# Altium PCB PCB1.PcbDoc (part 2 of 4)
Units mm, origin at the board's own origin, x right, y up, seen from the top; angles counter-clockwise.
Board outline 100 x 100 mm, 4 copper layers (Component Side 1, Ground Plane, Power Plane, Component Side 2), stack 0.844 mm thick; 174 components, 192 nets, 1098 pads, 545 vias.
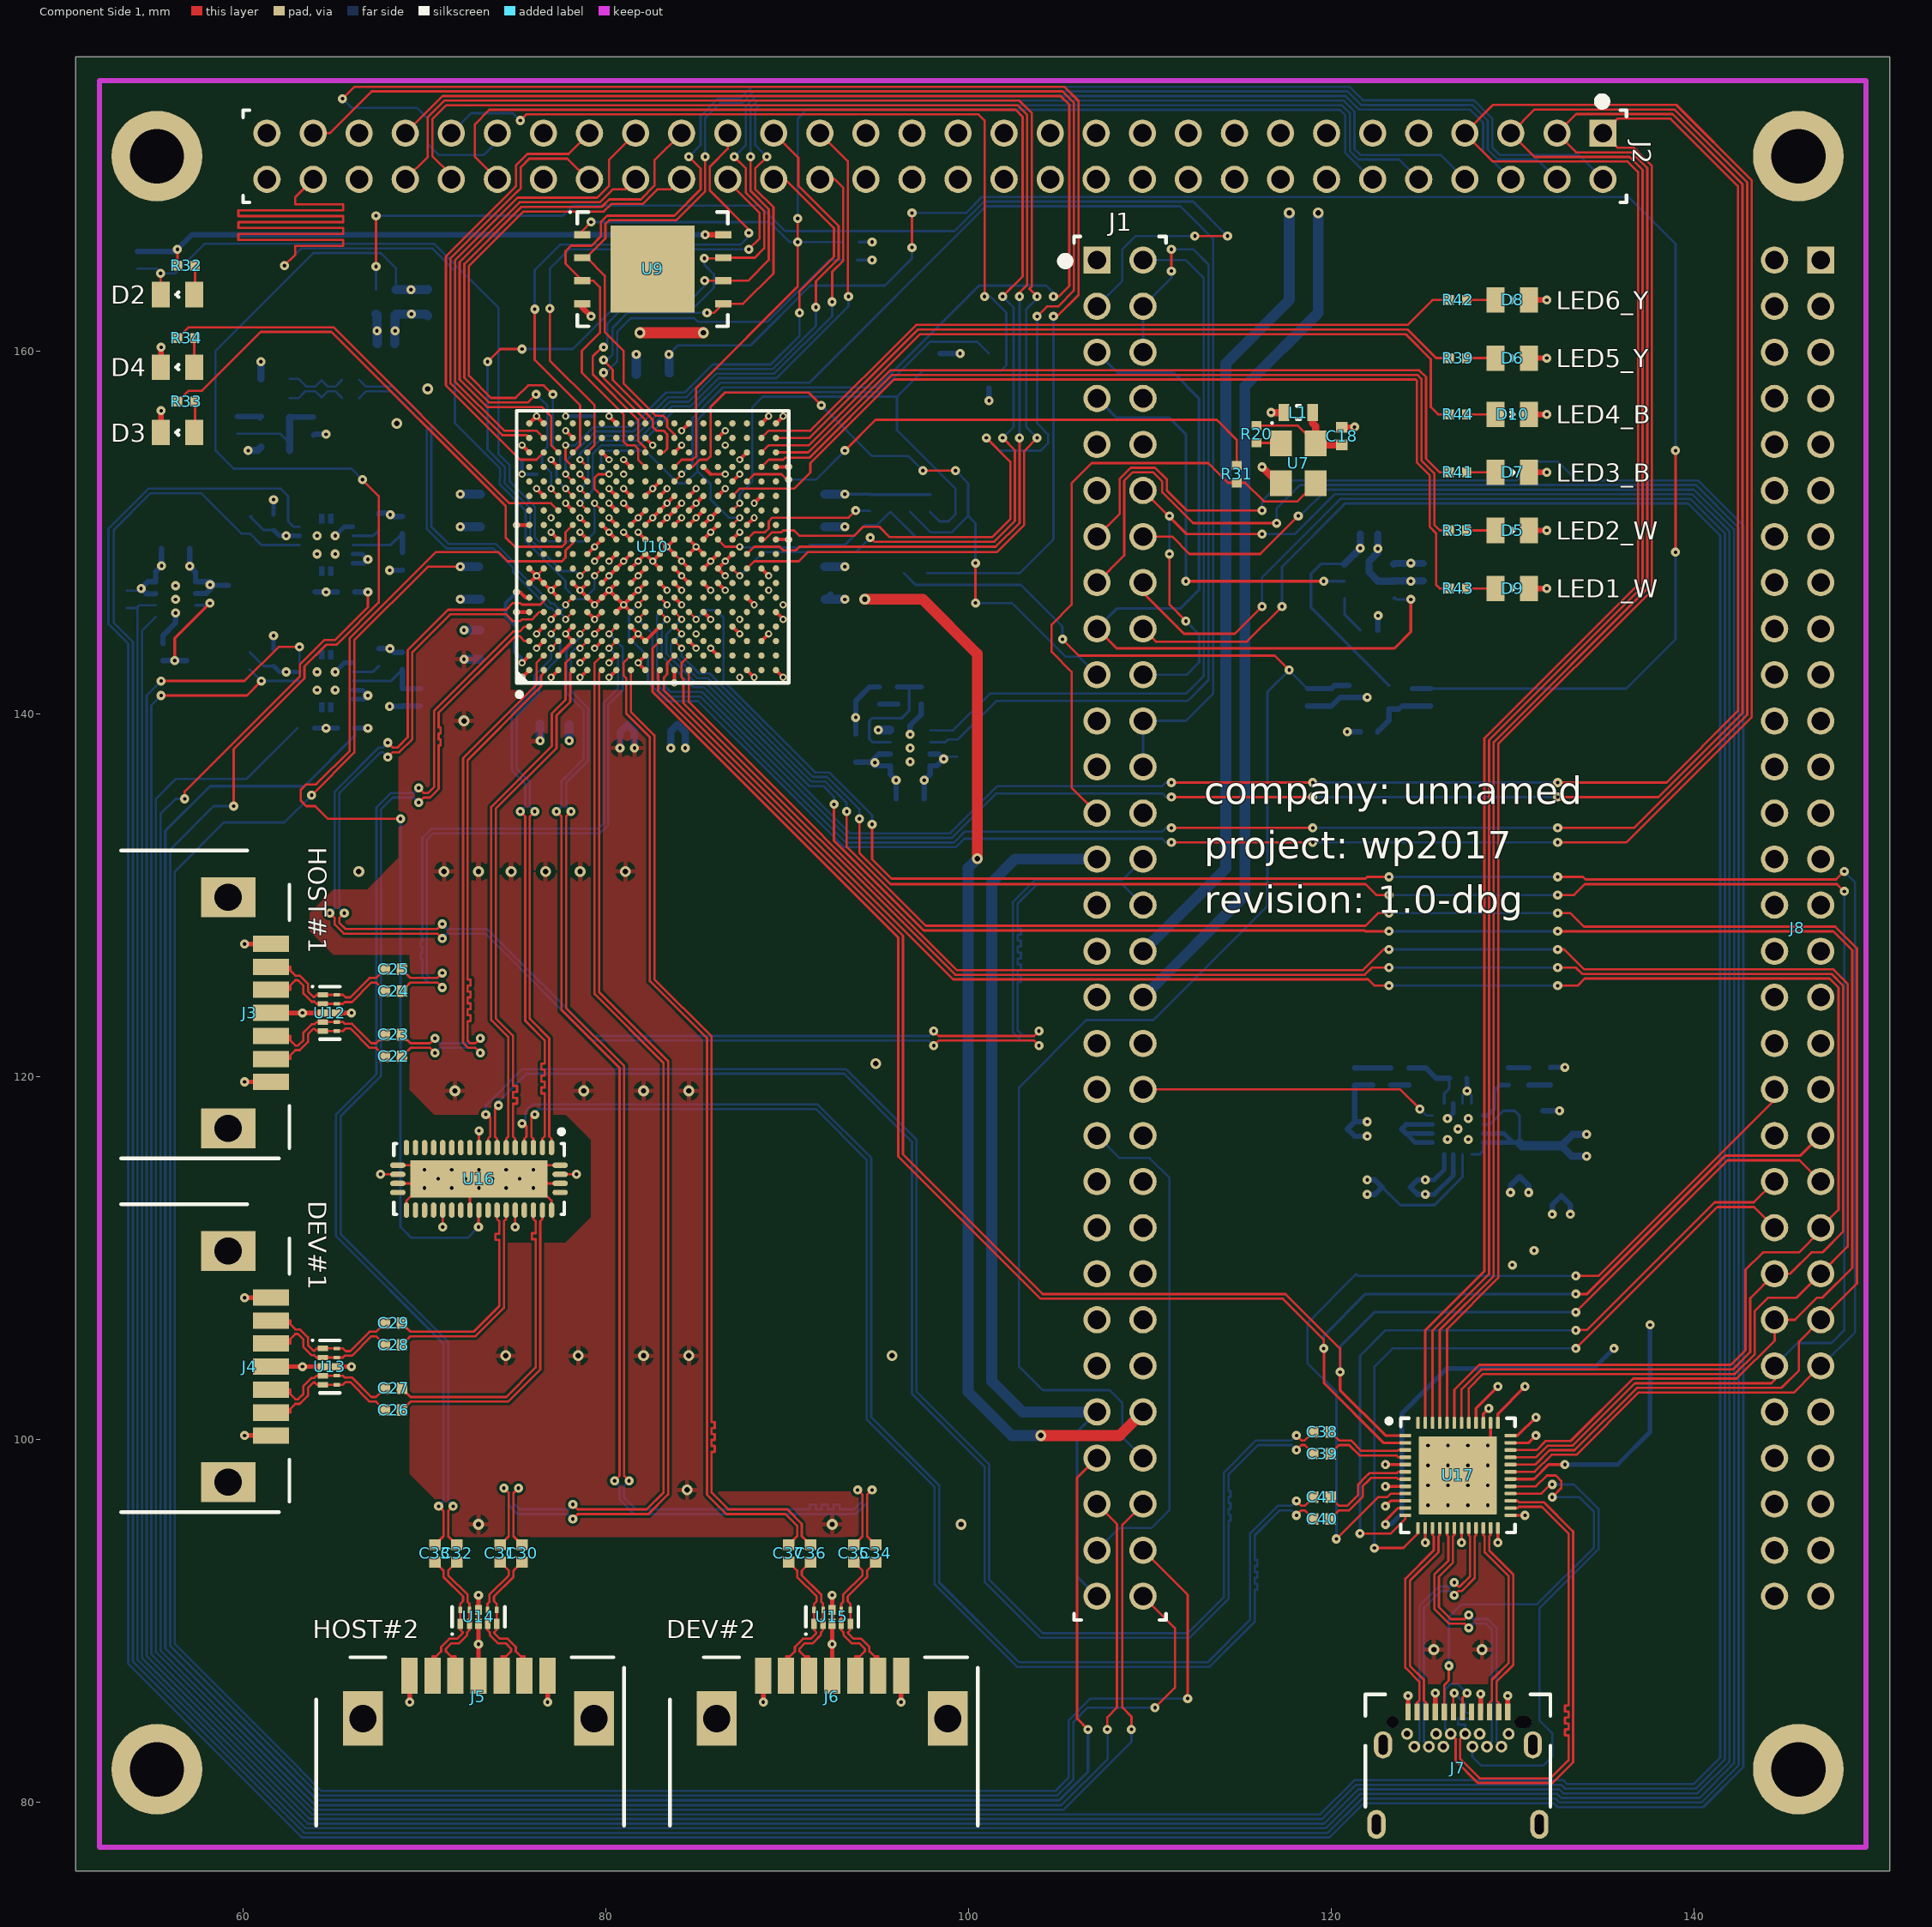
[diagram p0: Component Side 1 view]

## Via types
v1: diameter 0.5, hole 0.2, Component Side 1 to Component Side 2, 344 vias
v2: diameter 0.4, hole 0.2, Component Side 1 to Component Side 2, tented top, 149 vias
v3: diameter 0.6, hole 0.3, Component Side 1 to Component Side 2, 33 vias
v4: diameter 0.5, hole 0.2, Component Side 1 to Component Side 2, tented top, 14 vias
v5: diameter 0.5, hole 0.2, Component Side 1 to Component Side 2, tented bottom, 5 vias

## Nets (pads, with @x,y where several pads share a name; then routed paths per layer and width w, separated by ;. In a path a pad name is that pad's centre, name@x,y a point inside that pad or via, vN(x,y) a via of type N, cw(c..) or ccw(c..) an arc to the next point about the centre after c; other vN are vias at no path point) (continued)
B14_L0: (continued)
  Component Side 2 w0.127: v2(84.2,153.2) 84.8,153.8 84.8,156.3 86.483,157.983 94.983,157.983 100.6,163.6 104.3,163.6 104.7,163.2 v1(104.7,163)
B14_L25: J2.57 U10.U10 | length 87.2
  Component Side 1 w0.127: J2.57@63.88,172 64.8,172 67.105,174.305 105.195,174.305 105.829,173.671 105.829,163.329 104.95,162.45 104.35,162.45 v1(103.8,161.9) ; U10.U10@88.6,149.6 88.8,149.6 89.2,150 89.7,150 89.8,150.1 90.4,150.1 90.7,149.8 93.7,149.8 94.2,150.3 95.1,150.3 95.671,149.729 101.329,149.729 102.321,150.721 102.321,153.879 v1(101,155.2)
  Component Side 2 w0.127: v1(101,155.2) 101.7,154.5 104,154.5 104.4,154.9 104.4,155.4 103.8,156 v1(103.8,161.9)
B15_L11_N: J2.41 U10.C13 | length 33.1
  Component Side 1 w0.127: v1(76.171,157.6) 75.725,157.154 73.583,157.154 72.216,158.521 72.216,164.785 75.367,167.936 79.795,167.936 80.213,168.354 81.954,168.354 82.7,169.1 82.7,170.5 J2.41@84.2,172 ; v2(77,152.4) U10.C13@77.4,152
  Component Side 2 w0.127: v1(76.171,157.6) 76.8,156.971 76.8,154.7 76.5,154.4 76.5,153.8 77,153.3 v2(77,152.4)
B15_L11_P: J2.42 U10.D13 | length 31.6
  Component Side 1 w0.127: v1(77.1,157.6) 76.6,158.1 75.734,158.1 75.042,157.408 73.688,157.408 72.47,158.626 72.47,164.68 75.472,167.682 79.9,167.682 80.318,168.1 82.059,168.1 82.859,168.9 83.6,168.9 84.16,169.46 J2.42@84.2,169.46 ; v2(77.8,152.4) U10.D13@78.2,152
  Component Side 2 w0.127: v1(77.1,157.6) 77.1,154.7 77.5,154.3 77.5,153.7 77.3,153.5 77.3,152.9 v2(77.8,152.4)
B15_L12_N: J2.37 U10.D14 | length 30.8
  Component Side 1 w0.127: v2(77.8,153.2) U10.D14@78.2,152.8 ; J2.37@89.28,172 90.631,170.649 90.631,169.1 92.854,166.877 92.854,165.08 91.6,163.826 v1(91.6,162.4)
  Component Side 2 w0.127: v2(77.8,153.2) 77.8,153.9 79.462,155.562 81.555,155.562 83.439,157.446 84.468,157.446 86.021,158.999 89.216,158.999 91.6,161.383 v1(91.6,162.4)
B15_L12_P: J2.35 U10.E13 | length 30.7
  Component Side 1 w0.127: v2(78.6,152.4) U10.E13@79,152 ; J2.35@91.82,172 93.362,170.458 93.362,163.038 v1(93.4,163)
  Component Side 2 w0.127: v2(78.6,152.4) 79.04,152.84 79.04,154.422 79.672,155.054 81.766,155.054 83.65,156.938 84.678,156.938 86.231,158.491 89.426,158.491 93.4,162.465 v1(93.4,163)
B15_L13_N: J2.38 U10.D15 | length 27.9
  Component Side 1 w0.127: v2(77.8,154.8) 77.8,154 U10.D15@78.2,153.6 ; J2.38@89.28,169.425 89.947,169.425 92.6,166.772 92.6,165.185 90.7,163.285 v1(90.7,162.1)
  Component Side 2 w0.127: v2(77.8,154.8) 78.341,154.8 79.357,155.816 81.45,155.816 83.334,157.7 84.362,157.7 85.915,159.253 89.111,159.253 90.7,160.842 v1(90.7,162.1)
B15_L13_P: J2.36 U10.E15 | length 26.7
  Component Side 1 w0.127: v2(78.6,154) U10.E15@79,153.6 ; J2.36@91.82,169.46 92.64,169.46 93.108,168.992 93.108,164.975 92.5,164.367 v1(92.5,162.7)
  Component Side 2 w0.127: v2(78.6,154) 78.6,154.341 79.567,155.308 81.66,155.308 83.544,157.192 84.573,157.192 86.126,158.745 89.321,158.745 92.5,161.924 v1(92.5,162.7)